# EAGLE board ProgSwitch (EAGLE 7.4.0)
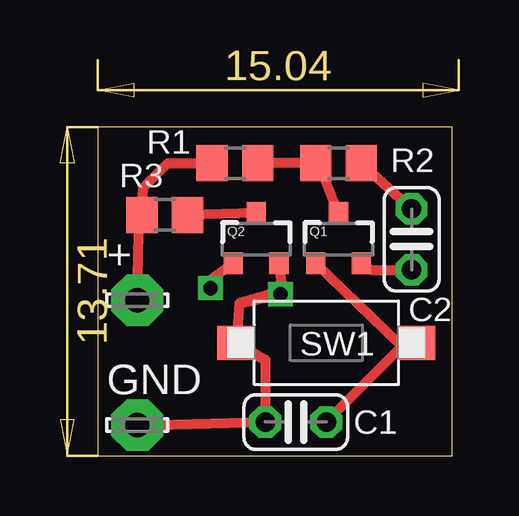
[diagram p0: board, top side]
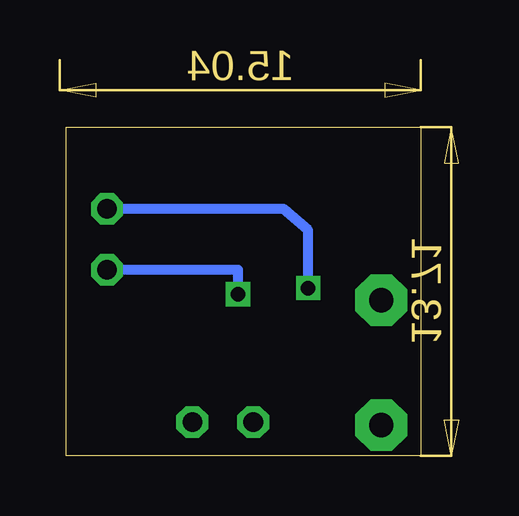
[diagram p1: board, bottom side, seen from below]

Size 14.78 x 13.71 mm. Coordinates in mm from the lower left corner, seen from the top.
Outline: 0,0 14.78,0 14.78,13.71 0,13.71 0,0
Copper layers (1*16): Top 0.035mm / dielectric 1.5mm / Bottom 0.035mm
Design rules "default": minimum track width 10mil, minimum drill 24mil, track to track 8mil, track to pad 8mil, pad to pad 8mil, via to via 8mil, smd to smd 8mil, copper to edge 40mil, drill to drill 8mil, minimum pad ring 10mil, minimum via ring 8mil, stop-mask expansion 4mil, vias tented up to drill 0mil, thermal gap 10mil

## Footprints (pad centres in the part's own frame; a part is rotated, then mirrored left to right if it is on the bottom)
LSP10 = drill 1.016 pad 2.159 octagon: MP 0,0
C025-024X044 = drill 0.813 octagon: 1 -1.27,0; 2 1.27,0
SOT23-3 = smd 0.8 x 0.9: 1 -0.95,-1; 2 0.95,-1; 3 0,1.1
R0805 = smd 1.3 x 1.5: 1 -0.95,0; 2 0.95,0
KSS-2EG4430 = smd 1.6 x 1.4: 1 -3.75,0; 2 3.75,0

## Placement (x,y rotation side)
+  LSP10  [LSP10]  1.65,6.48 0 top
C1  100nF  [C025-024X044]  8.26,1.4 0 top
C2  2u2F  [C025-024X044]  13.08,9.02 90 top
GND  LSP10  [LSP10]  1.65,1.27 0 top
Q1  BSS138  [SOT23-3]  10.03,9.02 0 top
Q2  BSS138  [SOT23-3]  6.6,9.02 0 top
R1  470K  [R0805]  5.71,12.19 180 top
R2  100K  [R0805]  10.03,12.19 0 top
R3  [R0805]  2.79,10.03 0 top
SW1  [KSS-2EG4430]  9.53,4.7 0 top

## Library data of the parts
+ GND = solpad
C1 C2 R1-R3 = rcl
Q1 Q2 = SparkFun-DiscreteSemi; PROD_ID: TRAN-12988
SW1 = buttons

## Nets
GND: C1.1 C2.1 GND.MP Q1.2 Q2.2 SW1.1
GPIO0: Q2.3 R3.2
N$3: Q1.3 R1.1 R2.1
N$4: C2.2 Q2.1 R2.2
RESET: C1.2 Q1.1 SW1.2
VCC: +.MP R1.2 R3.1

## Tracks (layer width: path | path; a pad name or v marks a point on that pad's centre or on a via)
GND  (via drill 0.6)
  Top 0.406: Q2.2 7.68,6.88 5.9,6.35 | 5.9,6.35 SW1.1 6.99,4 C1.1 GND.MP | Q1.2 11.38,7.75 C2.1 | 5.9,6.35 v7.62,6.73
  Bottom 0.406: v7.62,6.73 7.62,7.75 C2.1
GPIO0
  Top 0.406: Q2.3 R3.2
N$3
  Top 0.406: Q1.3 9.27,12.02 R2.1 R1.1
N$4  (via drill 0.6)
  Top 0.406: C2.2 R2.2 | Q2.1 4.7,7.32 v4.7,6.99
  Bottom 0.406: v4.7,6.99 4.7,9.4 5.71,10.29 C2.2
RESET
  Top 0.406: Q1.1 12.53,4.7 SW1.2 13.28,5.15 C1.2
VCC
  Top 0.406: R1.2 2.92,12.19 1.91,11.18 R3.1 1.72,9.27 +.MP